# Altium PCB Carrierboard_PCB.PcbDoc
Units mm, origin at the board's own origin, x right, y up, seen from the top; angles counter-clockwise.
Board outline 51.5 x 30 mm, 2 copper layers (Top Layer, Bottom Layer); 7 components, 16 nets, 109 pads, 19 vias.
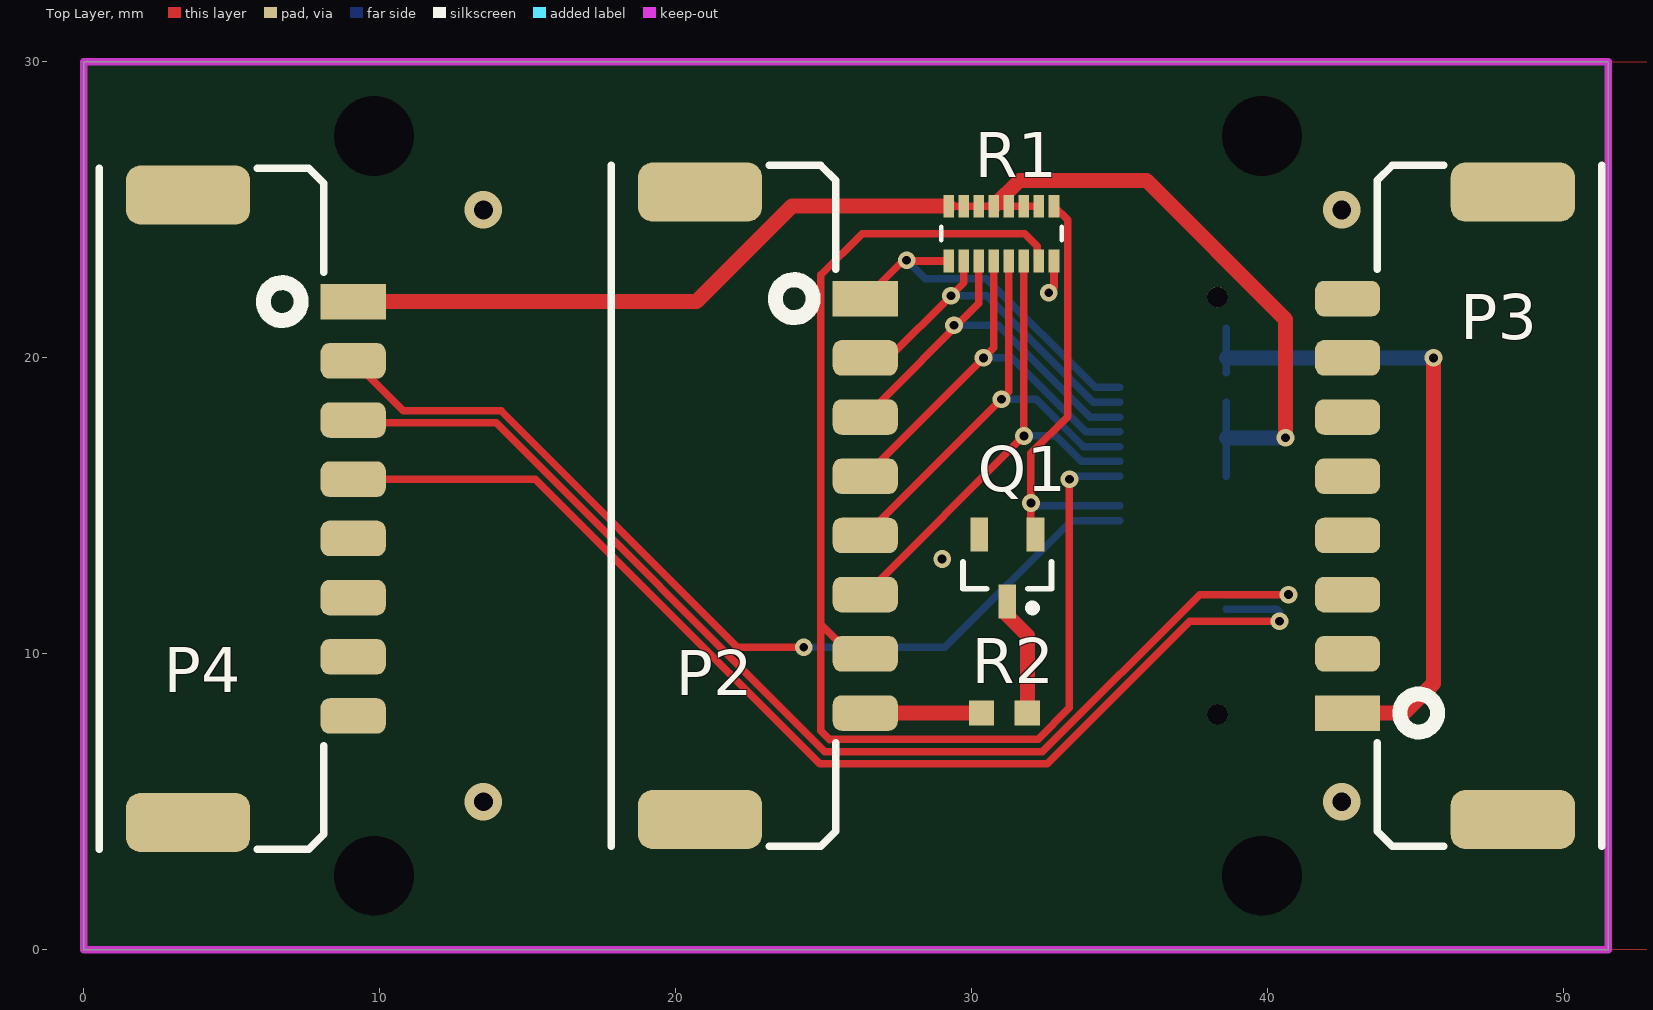
[diagram p0: Top Layer view]
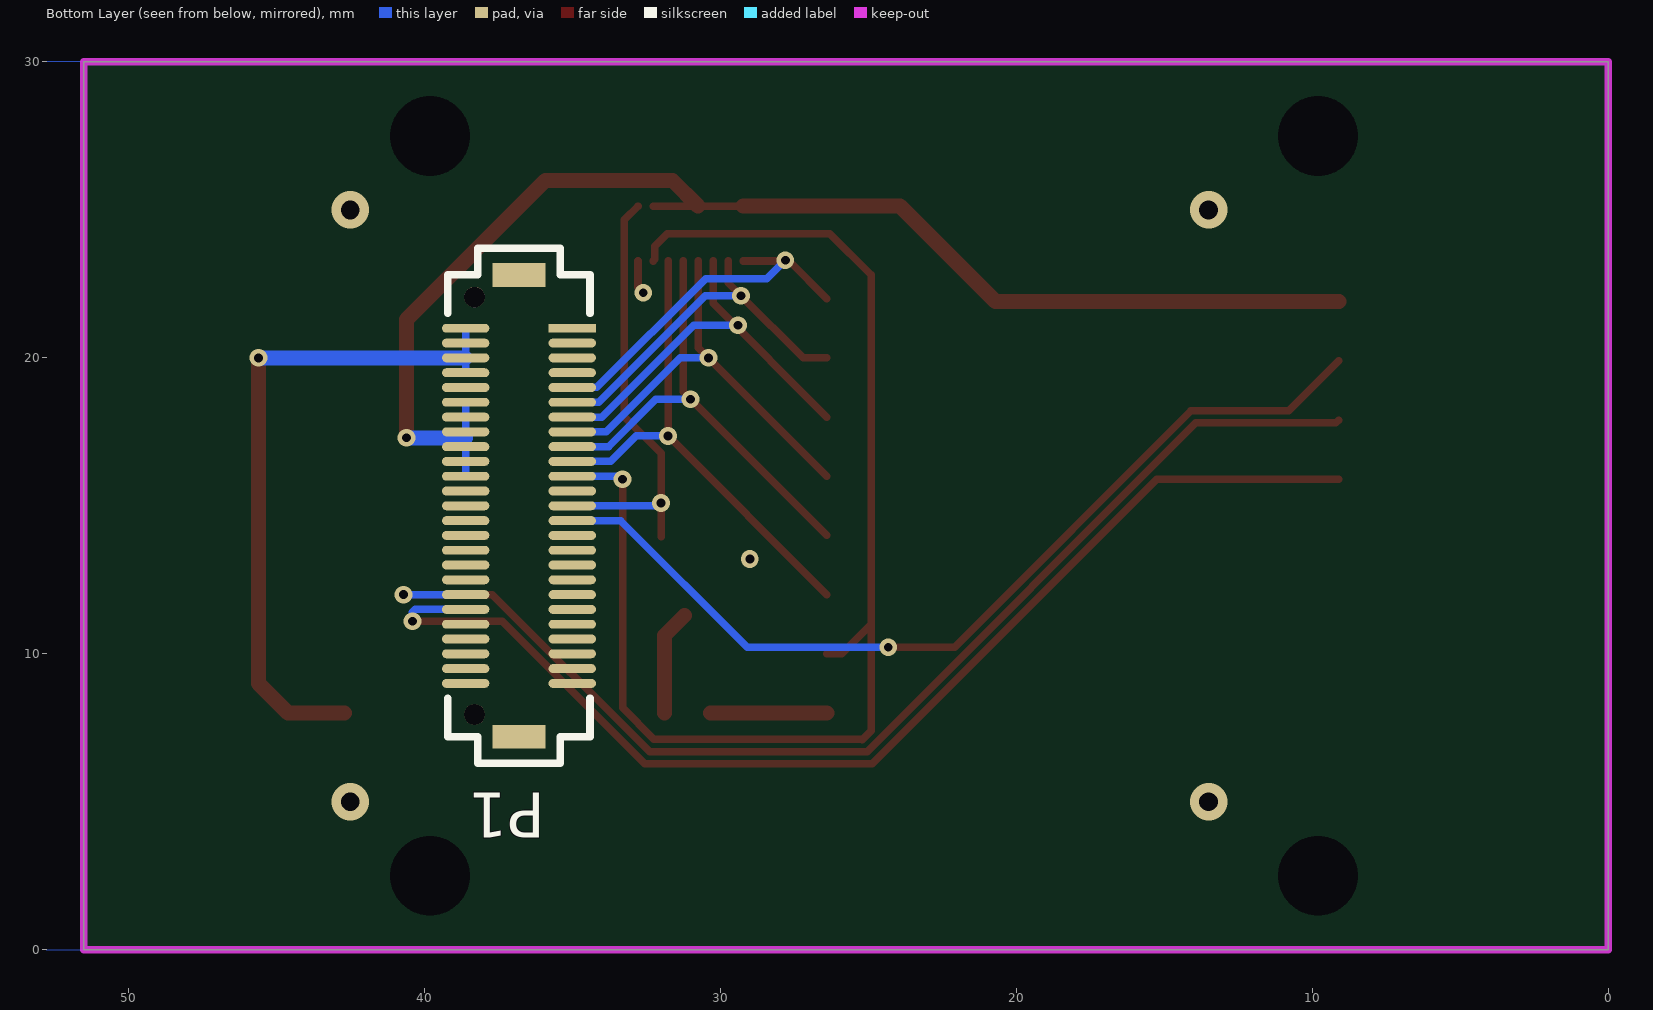
[diagram p1: Bottom Layer view, seen from below]

## Layer stack, top to bottom
Top Solder: solder mask 0.0102, Solder Resist, Dk 3.5
Top Layer: signal copper 0.0356
Dielectric 1: dielectric 0.32, FR-4, Dk 4.8
Bottom Layer: signal copper 0.0356
Bottom Solder: solder mask 0.0102, Solder Resist, Dk 3.5

## Board outline
0,30 0,0 51.5,0 51.5,30

## Design rules (kind name [scope] priority, off if disabled: settings)
Clearance [All] p1: gap=0.152 ignorepadtopadclearanceinfootprint=FALSE except(0.305: Arc-Fill Arc-Poly Arc-Region Track-Fill Track-Poly Track-Region SMDPad-Fill SMDPad-Poly SMDPad-Region THPad-Fill THPad-Poly THPad-Region Via-Fill Via-Poly Via-Region)
PolygonConnect [All] p1: connectstyle=Relief reliefconductorwidth=0.254 reliefentries=4 polygonreliefangle="90 Angle" airgapwidth=0.254
RoutingVias [All] p1: holewidth=0.711 width=1.27 viastyle="Through Hole" minholewidth=0.711 minwidth=1.27 maxholewidth=0.711 maxwidth=1.27
SolderMaskExpansion [All] p1: expansion=0.102
Width [All] p1: maxlimit=0.635 minlimit=0.254 preferedwidth=0.254
30 further rules are at their usual default settings.

## Classes and differential pairs
component class driverControlsMezzanine: P1
component class carrierboard: P2 P3 P4 Q1 R1 R2

## Components (designator, comment, footprint, x,y, rotation, side; value= is the part's Value field where it differs from the comment)
P1 "BergStak Plug" "CONN, Bergstak 50 Pos Plug" 36.8,15 r180 bottom
P2 "DURA-CLIK" "CONN, 8POS DURA-CLIK VERT" 26.4,22 r270 top
P3 "DURA-CLIK" "CONN, 8POS DURA-CLIK VERT" 42.7,8 r90 top
P4 "DURA-CLIK" "CONN, 8POS DURA-CLIK VERT" 9.1,21.9 r270 top
Q1 "N-CH" SOT23 31.2,12.9 r270 top
R1 "RES ARRAY 10K OHM 5% 8RES EXB-2HV103JV" "RES ARRAY, 8 POS 1506" 31,24.2 r90 top value=Value
R2 "820 Ohm" "RES, 0603" 31.1,8 r0 top

## Footprints (in the part's own frame and the unit in brackets; to place one, negate y for a bottom-side part, rotate by r counter-clockwise, add the part's x,y. Pads: shape width x height; smd on the part's side, far side on the other; paste and mask are expansions set on the pad)
"CONN, 8POS DURA-CLIK VERT" [mm]
  rect 1.2x2.2 smd: 1(0,0)
  rrect50% 1.2x2.2 smd: 2(2,0) 3(4,0) 4(6,0) 5(8,0) 6(10,0) 7(12,0) 8(14,0)
  rrect50% 2x4.2 smd: 9(-3.6,-5.58) 9(17.6,-5.58)
  silkscreen extent -4.5,-8.58 18.5,-1
"CONN, Bergstak 50 Pos Plug" [mm] "Bergstak 50 Position Plug"
  rect 1.6x0.3 smd: 1(1.8,6)
  oval 1.6x0.3 smd: 2(1.8,5.5) 3(1.8,5) 4(1.8,4.5) 5(1.8,4) 6(1.8,3.5) 7(1.8,3) 8(1.8,2.5) 9(1.8,2) 10(1.8,1.5) 11(1.8,1) 12(1.8,0.5) 13(1.8,0) 14(1.8,-0.5) 15(1.8,-1) 16(1.8,-1.5) 17(1.8,-2) 18(1.8,-2.5) 19(1.8,-3) 20(1.8,-3.5) 21(1.8,-4) 22(1.8,-4.5) 23(1.8,-5) 24(1.8,-5.5) 25(1.8,-6) 26(-1.8,-6) 27(-1.8,-5.5) 28(-1.8,-5) 29(-1.8,-4.5) 30(-1.8,-4) 31(-1.8,-3.5) 32(-1.8,-3) 33(-1.8,-2.5) 34(-1.8,-2) 35(-1.8,-1.5) 36(-1.8,-1) 37(-1.8,-0.5) 38(-1.8,0) 39(-1.8,0.5) 40(-1.8,1) 41(-1.8,1.5) 42(-1.8,2) 43(-1.8,2.5) 44(-1.8,3) 45(-1.8,3.5) 46(-1.8,4) 47(-1.8,4.5) 48(-1.8,5) 49(-1.8,5.5) 50(-1.8,6)
  round 0.7 hole 0.7: ""(-1.5,-7.05) ""(-1.5,7.05)
  rect 1.8x0.8 smd: ""(0,-7.8) ""(0,7.8)
  silkscreen extent -2.4,-8.7 2.4,8.7
"RES ARRAY, 8 POS 1506" [mil]
  rect 30x14 smd: 1(-36.5,70) 2(-36.5,50) 3(-36.5,30) 4(-36.5,10) 5(-36.5,-10) 6(-36.5,-30) 7(-36.5,-50) 8(-36.5,-70) 9(36.5,-70) 10(36.5,-50) 11(36.5,-30) 12(36.5,-10) 13(36.5,10) 14(36.5,30) 15(36.5,50) 16(36.5,70)
  silkscreen extent -9,-80 9,80, body extent -15,-80 15,80, height 10
"RES, 0603" [mm] "Chip Resistor, 2-Leads, Body 1.60x0.80mm, IPC Medium Density"
  rect 0.85x0.85 smd: 1(-0.775,0) 2(0.775,0)
  body extent -0.8,-0.4 0.8,0.4, height 0.55
SOT23 [mm] "SOT23, 3-Leads, Body 2.9x1.3mm, Pitch 0.95mm, Lead Span 2.3mm - Reverse Pinning, IPC Medium Density"
  rect 1.15x0.6 smd: 1(1.125,0) 2(-1.125,-0.95) 3(-1.125,0.95)
  silkscreen extent -0.2,-1.5 1.47,1.5, body extent -0.7,-1.5 0.7,1.5, height 1.1

## Part data
P1: library part "BergStak 50 Position Connector Plug", "50 Position Connector Plug, Outer Shroud Contacts Surface Mount Gold", Manufacturer PN=10132797-055100LF, Digikey PN=609-5226-1-ND
P2 P3 P4: library part "CONN 8POS DURA-CLIK 0.079\"", "8 Positions Header, Shrouded Connector 0.079\" (2.00mm) Surface Mount, Vertical Tin", Manufacturer=Molex, Manufacturer Part Number=5600200820, Supplier Part Number=WM10868CT-ND, Supplier=Digi-Key
Q1: library part "MOSFET N-CH 60V 6A 1.2W SOT-23F", "N-Channel 60V 6A (Ta) 1.2W (Ta) Surface Mount SOT-23F", Supplier Part Number 1=SSM3K341RLFCT-ND, Supplier 1=Digi-Key
R1: "RES ARRAY SMD 10K 5% 62.5mW 1506", Manufacturer_Part_Number=EXB-2HV103JV, Supplier Part Number 1=Y1103CT-ND, C="Copyright (C) 2015 Accelerated Designs. All rights reserved", Copyright="Copyright (C) 2015 Accelerated Designs. All rights reserved", Supplier 1=Digi-Key, Vendor=Panasonic
R2: library part "RES 820 OHM 5% 1/4W 0603", "RES SMD 820 OHM 5% 1/4W 0603", Manufacturer 1="Rohm Semiconductor", Manufacturer Part Number 1=ESR03EZPJ821, Operating Temperature="-55°C ~ 155°C", Package / Case="0603 (1608 Metric)", Power=1/4W, Resistance=820, Supplier Device Package=0603, Supplier Part Number 1=RHM820DCT-ND, Temperature Coefficient=±200ppm/°C, Tolerance=±5%, ComponentLink1Description=http://www.rohm.com/web/global/datasheet/ESR01MZPF/esr-e, ComponentLink1URL=http://www.rohm.com/web/global/datasheet/ESR01MZPF/esr-e, Composition="Thick Film", Failure Rate=-, Height - Seated (Max)="0.022\" (0.55mm)", Packaging="Cut Tape (CT)", Part Status=Active, Size / Dimension="0.063\" L x 0.031\" W (1.60mm x 0.80mm)", Supplier 1=Digi-Key

## Free pads (board coordinates)
  round 1.524 hole 2.7: 7(9.8,2.5) 7(9.8,27.5) 7(39.8,2.5) 7(39.8,27.5)

## Via types
v1: diameter 0.6, hole 0.3, Top Layer to Bottom Layer, 15 vias
v2: diameter 1.27, hole 0.635, Top Layer to Bottom Layer, 4 vias

## Nets (pads, with @x,y where several pads share a name; then routed paths per layer and width w, separated by ;. In a path a pad name is that pad's centre, name@x,y a point inside that pad or via, vN(x,y) a via of type N, cw(c..) or ccw(c..) an arc to the next point about the centre after c; other vN are vias at no path point)
+3V3: P1.40 P1.41 P1.42 P1.43 P1.44 P1.45 P4.1 R1.10 R1.11 R1.12 R1.13 R1.14 R1.15 R1.16 | length 45.2
  Top Layer w0.254: R1.16 R1.15 R1.14 R1.13 R1.12 R1.11 R1.10
  Top Layer w0.508: P4.1 20.7,21.9 23.927,25.127 R1.16 ; R1.13 31.619,26 35.9,26 40.6,21.3 v1(40.6,17.3)
  Bottom Layer w0.254: P1.40 P1.41 P1.42 38.6,17.3 P1.43 P1.44 P1.45
  Bottom Layer w0.508: 38.6,17.3 v1(40.6,17.3)
+12V: P1.47 P1.48 P1.49 P1.50 P3.1 | length 22.8
  Top Layer w0.508: P3.1 44.6,8 45.6,9 v1(45.6,20)
  Bottom Layer w0.254: P1.47 P1.48 P1.49 P1.50
  Bottom Layer w0.508: P1.48 v1(45.6,20)
BMSFault: P2.8 R2.1 | length 3.9
  Top Layer w0.508: P2.8 R2.1
dirSel0: P1.6 P2.2 R1.2 | length 12.3
  Top Layer w0.254: P2.2 27.2,20 v1(29.3,22.1) 29.73,22.53 R1.2
  Bottom Layer w0.254: v1(29.3,22.1) 30.5,22.1 34.1,18.5 P1.6
dirSel1: P1.7 P2.3 R1.3 | length 13.7
  Top Layer w0.254: P2.3 30.238,21.838 R1.3
  Bottom Layer w0.254: v1(29.4,21.1) 30.9,21.1 34,18 P1.7
GND: P1.1 P1.2 P1.3 P1.4 P1.26 P1.27 P1.28 P1.29 P3.2 P3.3 P3.4 P3.5 P3.6 P3.7 P3.8 P4.5 P4.6 P4.7 P4.8 Q1.2 R1.8 | length 1.1
  Top Layer w0.254: v1(32.6,22.2) 32.778,22.378 R1.8
  other v1: 29,13.2
  other v2: 13.5,5 42.5,5 13.5,25 42.5,25
GPIO_INT: P1.14 P4.2 | length 31.7
  Top Layer w0.254: P4.2 10.794,18.206 14.094,18.206 22.079,10.221 v1(24.321,10.221)
  Bottom Layer w0.254: v1(24.321,10.221) 29.09,10.221 33.369,14.5 P1.14
HAZ_LIGHT: P1.9 P2.5 R1.5 | length 15.9
  Top Layer w0.254: P2.5 v1(31,18.6) 31.254,18.854 R1.5
  Bottom Layer w0.254: v1(31,18.6) 32.175,18.6 33.775,17 P1.9
headLight: P1.8 P2.4 R1.4 | length 14.7
  Top Layer w0.254: P2.4 30.746,20.346 R1.4
  Bottom Layer w0.254: v1(30.4,20) 31.349,20 33.849,17.5 P1.8
LED_OUT: P1.13 Q1.3 R1.9 | length 14.9
  Top Layer w0.254: Q1.3@32,13.95 v1(32,15.1) 32,16.781 33.235,18.016 33.235,24.67 R1.9
  Bottom Layer w0.254: v1(32,15.1) 32.1,15 P1.13
NetQ1_3: Q1.1 R2.2 | length 3.6
  Top Layer w0.508: Q1.1@31.2,11.3 31.875,10.625 R2.2
PA10: P1.5 P2.1 R1.1 | length 12.3
  Top Layer w0.254: P2.1 27.673,23.273 R1.1
  Bottom Layer w0.254: v1(27.8,23.3) 28.421,22.679 30.495,22.679 34.175,19 P1.5
PB8/I2C1_SCL: P1.32 P4.3 | length 40.5
  Top Layer w0.254: P4.3 9.2,17.8 13.925,17.8 25.032,6.694 32.388,6.694 37.695,12 v1(40.7,12)
  Bottom Layer w0.254: P1.32 v1(40.7,12)
PB9/I2C1_SDA: P1.31 P4.4 | length 39.4
  Top Layer w0.254: P4.4 15.251,15.9 24.863,6.287 32.557,6.287 37.37,11.1 v1(40.4,11.1)
  Bottom Layer w0.254: P1.31 40.3,11.5 40.4,11.4 v1(40.4,11.1)
PB12/SPI2_NSS: P1.11 P2.7 R1.7 | length 44.3
  Top Layer w0.254: P2.7 25.9,10 24.9,11 ; R1.7 32.219,23.324 32.219,23.77 31.789,24.2 26.3,24.2 24.9,22.8 24.9,11 ; v1(33.3,15.9) 33.3,8.18 32.241,7.121 25.221,7.121 25.2,7.1 24.9,7.4 24.9,11
  Bottom Layer w0.254: v1(33.3,15.9) 33.4,16 P1.11
PB13/SPI2_SCK: P1.10 P2.6 R1.6 | length 17.1
  Top Layer w0.254: P2.6 v1(31.762,17.362) R1.6
  Bottom Layer w0.254: v1(31.762,17.362) 32.838,17.362 33.7,16.5 P1.10
pads on no net: P1. P1.12 P1.15 P1.16 P1.17 P1.18 P1.19 P1.20 P1.21 P1.22 P1.23 P1.24 P1.25 P1.30 P1.33 P1.34 P1.35 P1.36 P1.37 P1.38 P1.39 P1.46 P2.9 P3.9 P4.9

## Polygon pours and split planes (outlines as drawn)
GND on Bottom Layer "Bottom Layer-GND" (solid, remove dead copper, shelved, pour order 2): 0,0 0,30 53.1,30 53.1,0
GND on Top Layer "Top Layer-GND" (solid, remove dead copper, shelved, pour order 0): 0,0 0,30 53.1,30 53.1,0

## Keep-outs
Keep-Out Layer:
  lines w0.254: 0,0 51.5,0 51.5,7.7 51.5,22.7 51.5,30 0,30 0,0